# Altium PCB standos_rpi_com — копия.PcbDoc (part 2 of 2)
Units mm, origin at the board's own origin, x right, y up, seen from the top; angles counter-clockwise.
Board outline 197 x 179 mm, 2 copper layers (Top Layer, Bottom Layer); 29 components, 567 nets, 1552 pads, 0 vias.
Unrouted connection lines stored in the file: 121.
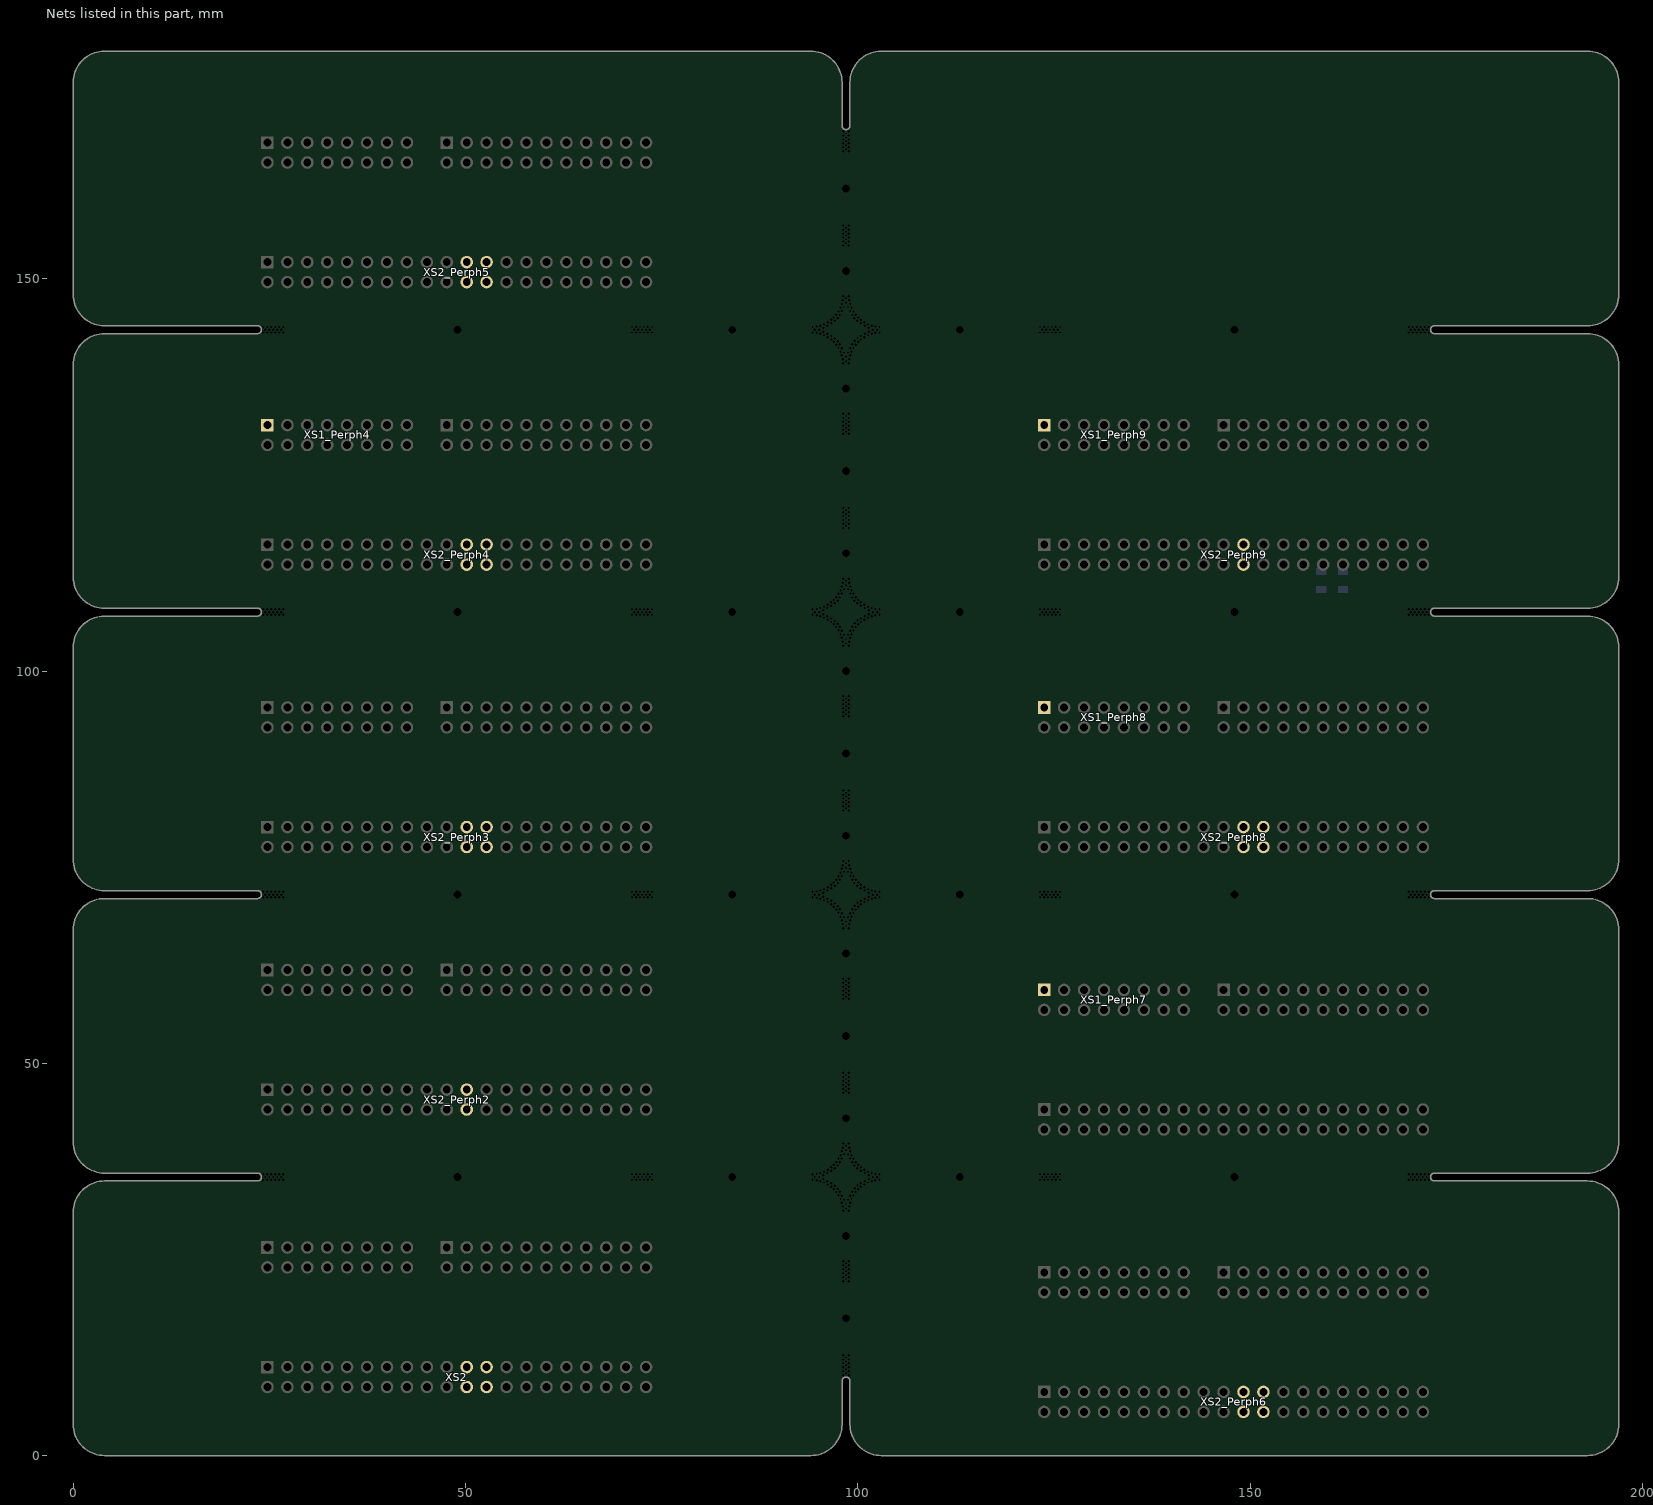
[diagram p2: the nets of this part, all layers, seen from the top]

## Nets (pads, with @x,y where several pads share a name; then routed paths per layer and width w, separated by ;. In a path a pad name is that pad's centre, name@x,y a point inside that pad or via, vN(x,y) a via of type N, cw(c..) or ccw(c..) an arc to the next point about the centre after c; other vN are vias at no path point) (continued)
STEPMOTOR.IN4_Perph4: XS1_Perph4.1
STEPMOTOR.IN4_Perph7: XS1_Perph7.1
STEPMOTOR.IN4_Perph8: XS1_Perph8.1
STEPMOTOR.IN4_Perph9: XS1_Perph9.1
ULTRASONIC_HC0.ECHO_Perph1: XS2.24
ULTRASONIC_HC0.ECHO_Perph3: XS2_Perph3.24
ULTRASONIC_HC0.ECHO_Perph4: XS2_Perph4.24
ULTRASONIC_HC0.ECHO_Perph5: XS2_Perph5.24
ULTRASONIC_HC0.ECHO_Perph6: XS2_Perph6.24
ULTRASONIC_HC0.ECHO_Perph8: XS2_Perph8.24
ULTRASONIC_HC0.TRIG_Perph1: XS2.23
ULTRASONIC_HC0.TRIG_Perph3: XS2_Perph3.23
ULTRASONIC_HC0.TRIG_Perph4: XS2_Perph4.23
ULTRASONIC_HC0.TRIG_Perph5: XS2_Perph5.23
ULTRASONIC_HC0.TRIG_Perph6: XS2_Perph6.23
ULTRASONIC_HC0.TRIG_Perph8: XS2_Perph8.23
ULTRASONIC_HC1.ECHO_Perph1: XS2.21
ULTRASONIC_HC1.ECHO_Perph2: XS2_Perph2.21
ULTRASONIC_HC1.ECHO_Perph3: XS2_Perph3.21
ULTRASONIC_HC1.ECHO_Perph4: XS2_Perph4.21
ULTRASONIC_HC1.ECHO_Perph5: XS2_Perph5.21
ULTRASONIC_HC1.ECHO_Perph6: XS2_Perph6.21
ULTRASONIC_HC1.ECHO_Perph8: XS2_Perph8.21
ULTRASONIC_HC1.ECHO_Perph9: XS2_Perph9.21
ULTRASONIC_HC1.TRIG_Perph1: XS2.22
ULTRASONIC_HC1.TRIG_Perph2: XS2_Perph2.22
ULTRASONIC_HC1.TRIG_Perph3: XS2_Perph3.22
ULTRASONIC_HC1.TRIG_Perph4: XS2_Perph4.22
ULTRASONIC_HC1.TRIG_Perph5: XS2_Perph5.22
ULTRASONIC_HC1.TRIG_Perph6: XS2_Perph6.22
ULTRASONIC_HC1.TRIG_Perph8: XS2_Perph8.22
ULTRASONIC_HC1.TRIG_Perph9: XS2_Perph9.22
pads on no net: XS2.1 XS2.2 XS2_Perph2.1 XS2_Perph2.2 XS2_Perph3.1 XS2_Perph3.2 XS2_Perph4.1 XS2_Perph4.2 XS2_Perph5.1 XS2_Perph5.2 XS2_Perph6.1 XS2_Perph6.2 XS2_Perph7.1 XS2_Perph7.2 XS2_Perph8.1 XS2_Perph8.2 XS2_Perph9.1 XS2_Perph9.2

## Silkscreen, mask and mechanical layers (free items; w line width, h text height)
Top Overlay:
  drawing of 1683 lines, arcs and shapes, not listed
  text "STEPMTR" at 23.914,177.383 h0.64
  text "GYRO" at 29.946,177.383 h0.64
  text "NAV" at 35.344,177.383 h0.64
  text "PWR" at 49.314,177.383 h0.64
  text "SPI1" at 54.235,177.383 h0.64
  text "SPI4" at 60.479,177.383 h0.64
  text "UART5" at 66.459,177.383 h0.64
  text "GPIO" at 70.639,177.383 h0.64
  text "STEPMOTOR" at 5.26,177.1 h0.64
  text "ADS1115" at 15.76,177.1 h0.64
  text "StandOS" at 76.5,176.75 h1
  text "v.2 2022" at 89.15,176.65 h0.9
  text "MOSI" at 34.074,175.605 h0.51
  text "MISO" at 61.971,175.605 h0.51
  text "MOSI" at 56.849,175.554 h0.56
  text "SCLK" at 36.389,175.529 h0.58
  text "IN4" at 23.967,175.478 h0.64
  text "IN2" at 26.507,175.478 h0.64
  text "INT" at 29.047,175.478 h0.64
  text "CS" at 31.851,175.478 h0.64
  text "INT" at 39.207,175.478 h0.64
  text "5V" at 49.631,175.478 h0.64
  text "GND" at 64.554,175.478 h0.64
  text "TX" at 67.411,175.478 h0.64
  text "nCE / 1" at 51.727,174.285 h0.64
  text "nCE / 0" at 54.267,174.285 h0.64
  text "nCE / 0" at 59.347,174.285 h0.64
  text "27" at 69.242,174.285 h0.58
  text "11" at 71.782,174.285 h0.51
  text "CS / M" at 41.62,174.168 h0.64
  text "Commutation board / for Raspberry Pi" at 76.25,173.225 h0.8
  text "MISO" at 56.891,173.065 h0.51
  text "MOSI" at 64.554,173.065 h0.51
  text "MISO" at 36.438,172.989 h0.58
  text "IN3" at 23.967,172.938 h0.64
  text "IN1" at 26.612,172.938 h0.64
  text "DR" at 29.311,172.938 h0.64
  text "SDO" at 31.534,172.938 h0.64
  text "3V3" at 49.314,172.938 h0.64
  text "SCK" at 54.394,172.938 h0.64
  text "SCK" at 62.014,172.938 h0.64
  text "RX" at 67.411,172.938 h0.64
  text "CS / A/G" at 33.64,171.745 h0.58
  text "nCE / 2" at 51.727,171.745 h0.64
  text "nCE / 1" at 59.347,171.745 h0.64
  text "26" at 69.242,171.745 h0.58
  text "8" at 71.782,171.745 h0.58
  text "DRDY / M" at 38.392,171.628 h0.58
  text "CS / ALT" at 41.567,171.628 h0.64
  text "GYRO GY-50" at 1.51,169.6 h0.64
  text "KEYPAD COM-08653" at 9.76,169.6 h0.64
  text "#" at 76.26,169.4 h2.4
  text "AUDIO" at 90.118,166.711 h0.64
  text "DISPLAY MSP3520" at 78.01,166.6 h0.64
  text "PMOD NAV" at 1.76,163.1 h0.64
  text "H0 & H1" at 90.368,160.6 h0.64
  text "Variant 5" at 27.933,158.852 h5
  text "RFID RC522" at 76.885,156.711 h0.64
  text "PMOD COLOR" at 1.51,156.645 h0.64
  text "LEDS" at 8.618,156.6 h0.64
  text "BUTTONS" at 15.618,156.6 h0.64
  text "H1" at 90.118,156.6 h0.64
  text "H0" at 89.834,150.211 h0.64
  text "PMODENC" at 1.76,150.1 h0.64
  text "KY-038" at 8.618,150.1 h0.64
  text "GL5516" at 15.76,150.1 h0.64
  text "GP2Y0A02YK0F" at 77.57,150.1 h0.64
  text "ALRT" at 23.829,149.57 h0.51
  text "MDS" at 26.454,149.443 h0.64
  text "B" at 29.628,149.443 h0.64
  text "SWT" at 31.534,149.443 h0.64
  text "C1" at 34.497,149.443 h0.64
  text "C0" at 36.931,149.443 h0.64
  text "C2" at 39.471,149.443 h0.64
  text "R1" at 42.117,149.443 h0.64
  text "RX" at 44.551,149.443 h0.64
  text "PWM" at 46.774,149.443 h0.64
  text "H1E" at 49.367,149.443 h0.64
  text "H0T" at 51.854,149.443 h0.64
  text "IRQ" at 54.447,149.443 h0.64
  text "MOSI" at 56.722,149.443 h0.64
  text "SS" at 59.791,149.443 h0.64
  text "GND" at 72.174,149.443 h0.64
  text "LCD / nCE" at 61.569,148.25 h0.51
  text "LCD / DC/RS" at 63.792,148.25 h0.51
  text "TCH / nCE" at 66.967,148.25 h0.51
  text "MISO" at 69.242,148.25 h0.64
  text "MOSI" at 69.634,147.03 h0.51
  text "INT" at 23.967,146.903 h0.64
  text "RST" at 26.454,146.903 h0.64
  text "A" at 29.628,146.903 h0.64
  text "BTN" at 31.534,146.903 h0.64
  text "GND" at 34.074,146.903 h0.64
  text "R0" at 36.931,146.903 h0.64
  text "R3" at 39.471,146.903 h0.64
  text "R2" at 42.011,146.903 h0.64
  text "AN" at 44.551,146.903 h0.64
  text "TX" at 47.091,146.903 h0.64
  text "H1T" at 49.367,146.903 h0.64
  text "H0E" at 51.854,146.903 h0.64
  text "RST" at 54.394,146.903 h0.64
  text "MISO" at 56.669,146.903 h0.64
  text "SCK" at 59.474,146.903 h0.64
  text "CRD / nCE" at 61.569,145.71 h0.51
  text "LCD / RST" at 64.427,145.71 h0.51
  text "SCK" at 66.967,145.71 h0.51
  text "TCH / IRQ" at 72.047,145.71 h0.51
  text "ADC" at 23.787,144.617 h0.64
  text "ENCODER" at 28.867,144.617 h0.64
  text "KEYPAD" at 36.487,144.617 h0.64
  text "SONAR" at 44.107,144.617 h0.64
  text "SONIC" at 49.187,144.617 h0.64
  text "RFID" at 55.537,144.617 h0.64
  text "DISPLAY" at 65.697,144.617 h0.64
  text "STEPMTR" at 23.914,141.383 h0.64
  text "GYRO" at 29.946,141.383 h0.64
  text "NAV" at 35.344,141.383 h0.64
  text "PWR" at 49.314,141.383 h0.64
  text "SPI1" at 54.235,141.383 h0.64
  text "SPI4" at 60.479,141.383 h0.64
  text "UART5" at 66.459,141.383 h0.64
  text "GPIO" at 70.639,141.383 h0.64
  text "STEPMTR" at 122.914,141.383 h0.64
  text "GYRO" at 128.946,141.383 h0.64
  text "NAV" at 134.344,141.383 h0.64
  text "PWR" at 148.314,141.383 h0.64
  text "SPI1" at 153.235,141.383 h0.64
  text "SPI4" at 159.479,141.383 h0.64
  text "UART5" at 165.459,141.383 h0.64
  text "GPIO" at 169.639,141.383 h0.64
  text "STEPMOTOR" at 5.26,141.1 h0.64
  text "ADS1115" at 15.76,141.1 h0.64
  text "STEPMOTOR" at 104.26,141.1 h0.64
  text "ADS1115" at 114.76,141.1 h0.64
  text "StandOS" at 76.5,140.75 h1
  text "StandOS" at 175.5,140.75 h1
  text "v.2 2022" at 89.15,140.65 h0.9
  text "v.2 2022" at 188.15,140.65 h0.9
  text "MOSI" at 34.074,139.605 h0.51
  text "MISO" at 61.971,139.605 h0.51
  text "MOSI" at 133.074,139.605 h0.51
  text "MISO" at 160.971,139.605 h0.51
  text "MOSI" at 56.849,139.554 h0.56
  text "MOSI" at 155.849,139.554 h0.56
  text "SCLK" at 36.389,139.529 h0.58
  text "SCLK" at 135.389,139.529 h0.58
  text "IN4" at 23.967,139.478 h0.64
  text "IN2" at 26.507,139.478 h0.64
  text "INT" at 29.047,139.478 h0.64
  text "CS" at 31.851,139.478 h0.64
  text "INT" at 39.207,139.478 h0.64
  text "5V" at 49.631,139.478 h0.64
  text "GND" at 64.554,139.478 h0.64
  text "TX" at 67.411,139.478 h0.64
  text "IN4" at 122.967,139.478 h0.64
  text "IN2" at 125.507,139.478 h0.64
  text "INT" at 128.047,139.478 h0.64
  text "CS" at 130.851,139.478 h0.64
  text "INT" at 138.207,139.478 h0.64
  text "5V" at 148.631,139.478 h0.64
  text "GND" at 163.554,139.478 h0.64
  text "TX" at 166.411,139.478 h0.64
  text "nCE / 1" at 51.727,138.285 h0.64
  text "nCE / 0" at 54.267,138.285 h0.64
  text "nCE / 0" at 59.347,138.285 h0.64
  text "27" at 69.242,138.285 h0.58
  text "11" at 71.782,138.285 h0.51
  text "nCE / 1" at 150.727,138.285 h0.64
  text "nCE / 0" at 153.267,138.285 h0.64
  text "nCE / 0" at 158.347,138.285 h0.64
  text "27" at 168.242,138.285 h0.58
  text "11" at 170.782,138.285 h0.51
  text "CS / M" at 41.62,138.168 h0.64
  text "CS / M" at 140.62,138.168 h0.64
  text "Commutation board / for Raspberry Pi" at 76.25,137.225 h0.8
  text "Commutation board / for Raspberry Pi" at 175.25,137.225 h0.8
  text "MISO" at 56.891,137.065 h0.51
  text "MOSI" at 64.554,137.065 h0.51
  text "MISO" at 155.891,137.065 h0.51
  text "MOSI" at 163.554,137.065 h0.51
  text "MISO" at 36.438,136.989 h0.58
  text "MISO" at 135.438,136.989 h0.58
  text "IN3" at 23.967,136.938 h0.64
  text "IN1" at 26.612,136.938 h0.64
  text "DR" at 29.311,136.938 h0.64
  text "SDO" at 31.534,136.938 h0.64
  text "3V3" at 49.314,136.938 h0.64
  text "SCK" at 54.394,136.938 h0.64
  text "SCK" at 62.014,136.938 h0.64
  text "RX" at 67.411,136.938 h0.64
  text "IN3" at 122.967,136.938 h0.64
  text "IN1" at 125.612,136.938 h0.64
  text "DR" at 128.311,136.938 h0.64
  text "SDO" at 130.534,136.938 h0.64
  text "3V3" at 148.314,136.938 h0.64
  text "SCK" at 153.394,136.938 h0.64
  text "SCK" at 161.014,136.938 h0.64
  text "RX" at 166.411,136.938 h0.64
  text "CS / A/G" at 33.64,135.745 h0.58
  text "nCE / 2" at 51.727,135.745 h0.64
  text "nCE / 1" at 59.347,135.745 h0.64
  text "26" at 69.242,135.745 h0.58
  text "8" at 71.782,135.745 h0.58
  text "CS / A/G" at 132.64,135.745 h0.58
  text "nCE / 2" at 150.727,135.745 h0.64
  text "nCE / 1" at 158.347,135.745 h0.64
  text "26" at 168.242,135.745 h0.58
  text "8" at 170.782,135.745 h0.58
  text "DRDY / M" at 38.392,135.628 h0.58
  text "CS / ALT" at 41.567,135.628 h0.64
  text "DRDY / M" at 137.392,135.628 h0.58
  text "CS / ALT" at 140.567,135.628 h0.64
  text "GYRO GY-50" at 1.51,133.6 h0.64
  text "KEYPAD COM-08653" at 9.76,133.6 h0.64
  text "GYRO GY-50" at 100.51,133.6 h0.64
  text "KEYPAD COM-08653" at 108.76,133.6 h0.64
  text "#" at 76.26,133.4 h2.4
  text "#" at 175.26,133.4 h2.4
  text "AUDIO" at 90.118,130.711 h0.64
  text "AUDIO" at 189.118,130.711 h0.64
  text "DISPLAY MSP3520" at 78.01,130.6 h0.64
  text "DISPLAY MSP3520" at 177.01,130.6 h0.64
  text "PMOD NAV" at 1.76,127.1 h0.64
  text "PMOD NAV" at 100.76,127.1 h0.64
  text "H0 & H1" at 90.368,124.6 h0.64
  text "H0 & H1" at 189.368,124.6 h0.64
  text "IND" at 192.25,123 h0.6
  text "Variant 4" at 27.933,122.852 h5
  text "Variant 9" at 126.933,122.852 h5
  text "RFID RC522" at 76.885,120.711 h0.64
  text "RFID RC522" at 175.885,120.711 h0.64
  text "PMOD COLOR" at 1.51,120.645 h0.64
  text "PMOD COLOR" at 100.51,120.645 h0.64
  text "LEDS" at 8.618,120.6 h0.64
  text "BUTTONS" at 15.618,120.6 h0.64
  text "H1" at 90.118,120.6 h0.64
  text "LEDS" at 107.618,120.6 h0.64
  text "BUTTONS" at 114.618,120.6 h0.64
  text "H1" at 189.118,120.6 h0.64
  text "H0" at 89.834,114.211 h0.64
  text "H0" at 188.834,114.211 h0.64
  text "PMODENC" at 1.76,114.1 h0.64
  text "KY-038" at 8.618,114.1 h0.64
  text "GL5516" at 15.76,114.1 h0.64
  text "GP2Y0A02YK0F" at 77.57,114.1 h0.64
  text "PMODENC" at 100.76,114.1 h0.64
  text "KY-038" at 107.618,114.1 h0.64
  text "GL5516" at 114.76,114.1 h0.64
  text "GP2Y0A02YK0F" at 176.57,114.1 h0.64
  text "ALRT" at 23.829,113.57 h0.51
  text "ALRT" at 122.829,113.57 h0.51
  text "MDS" at 26.454,113.443 h0.64
  text "B" at 29.628,113.443 h0.64
  text "SWT" at 31.534,113.443 h0.64
  text "C1" at 34.497,113.443 h0.64
  text "C0" at 36.931,113.443 h0.64
  text "C2" at 39.471,113.443 h0.64
  text "R1" at 42.117,113.443 h0.64
  text "RX" at 44.551,113.443 h0.64
  text "PWM" at 46.774,113.443 h0.64
  text "H1E" at 49.367,113.443 h0.64
  text "H0T" at 51.854,113.443 h0.64
  text "IRQ" at 54.447,113.443 h0.64
  text "MOSI" at 56.722,113.443 h0.64
  text "SS" at 59.791,113.443 h0.64
  text "GND" at 72.174,113.443 h0.64
  text "MDS" at 125.454,113.443 h0.64
  text "B" at 128.628,113.443 h0.64
  text "SWT" at 130.534,113.443 h0.64
  text "C1" at 133.497,113.443 h0.64
  text "C0" at 135.931,113.443 h0.64
  text "C2" at 138.471,113.443 h0.64
  text "R1" at 141.117,113.443 h0.64
  text "RX" at 143.551,113.443 h0.64
  text "PWM" at 145.774,113.443 h0.64
  text "H1E" at 148.367,113.443 h0.64
  text "H0T" at 150.854,113.443 h0.64
  text "IRQ" at 153.447,113.443 h0.64
  text "MOSI" at 155.722,113.443 h0.64
  text "SS" at 158.791,113.443 h0.64
  text "GND" at 171.174,113.443 h0.64
  text "LCD / nCE" at 61.569,112.25 h0.51
  text "LCD / DC/RS" at 63.792,112.25 h0.51
  text "TCH / nCE" at 66.967,112.25 h0.51
  text "MISO" at 69.242,112.25 h0.64
  text "LCD / nCE" at 160.569,112.25 h0.51
  text "LCD / DC/RS" at 162.792,112.25 h0.51
  text "TCH / nCE" at 165.967,112.25 h0.51
  text "MISO" at 168.242,112.25 h0.64
  text "MOSI" at 69.634,111.03 h0.51
  text "MOSI" at 168.634,111.03 h0.51
  text "INT" at 23.967,110.903 h0.64
  text "RST" at 26.454,110.903 h0.64
  text "A" at 29.628,110.903 h0.64
  text "BTN" at 31.534,110.903 h0.64
  text "GND" at 34.074,110.903 h0.64
  text "R0" at 36.931,110.903 h0.64
  text "R3" at 39.471,110.903 h0.64
  text "R2" at 42.011,110.903 h0.64
  text "AN" at 44.551,110.903 h0.64
  text "TX" at 47.091,110.903 h0.64
  text "H1T" at 49.367,110.903 h0.64
  text "H0E" at 51.854,110.903 h0.64
  text "RST" at 54.394,110.903 h0.64
  text "MISO" at 56.669,110.903 h0.64
  text "SCK" at 59.474,110.903 h0.64
  text "INT" at 122.967,110.903 h0.64
  text "RST" at 125.454,110.903 h0.64
  text "A" at 128.628,110.903 h0.64
  text "BTN" at 130.534,110.903 h0.64
  text "GND" at 133.074,110.903 h0.64
  text "R0" at 135.931,110.903 h0.64
  text "R3" at 138.471,110.903 h0.64
  text "R2" at 141.011,110.903 h0.64
  text "AN" at 143.551,110.903 h0.64
  text "TX" at 146.091,110.903 h0.64
  text "H1T" at 148.367,110.903 h0.64
  text "H0E" at 150.854,110.903 h0.64
  text "RST" at 153.394,110.903 h0.64
  text "MISO" at 155.669,110.903 h0.64
  text "SCK" at 158.474,110.903 h0.64
  text "CRD / nCE" at 61.569,109.71 h0.51
  text "LCD / RST" at 64.427,109.71 h0.51
  text "SCK" at 66.967,109.71 h0.51
  text "TCH / IRQ" at 72.047,109.71 h0.51
  text "CRD / nCE" at 160.569,109.71 h0.51
  text "LCD / RST" at 163.427,109.71 h0.51
  text "SCK" at 165.967,109.71 h0.51
  text "TCH / IRQ" at 171.047,109.71 h0.51
  text "ADC" at 23.787,108.617 h0.64
  text "ENCODER" at 28.867,108.617 h0.64
  text "KEYPAD" at 36.487,108.617 h0.64
  text "SONAR" at 44.107,108.617 h0.64
  text "SONIC" at 49.187,108.617 h0.64
  text "RFID" at 55.537,108.617 h0.64
  text "DISPLAY" at 65.697,108.617 h0.64
  text "ADC" at 122.787,108.617 h0.64
  text "ENCODER" at 127.867,108.617 h0.64
  text "KEYPAD" at 135.487,108.617 h0.64
  text "SONAR" at 143.107,108.617 h0.64
  text "SONIC" at 148.187,108.617 h0.64
  text "RFID" at 154.537,108.617 h0.64
  text "DISPLAY" at 164.697,108.617 h0.64
  text "STEPMTR" at 23.914,105.383 h0.64
  text "GYRO" at 29.946,105.383 h0.64
  text "NAV" at 35.344,105.383 h0.64
  text "PWR" at 49.314,105.383 h0.64
  text "SPI1" at 54.235,105.383 h0.64
  text "SPI4" at 60.479,105.383 h0.64
  text "UART5" at 66.459,105.383 h0.64
  text "GPIO" at 70.639,105.383 h0.64
  text "STEPMTR" at 122.914,105.383 h0.64
  text "GYRO" at 128.946,105.383 h0.64
  text "NAV" at 134.344,105.383 h0.64
  text "PWR" at 148.314,105.383 h0.64
  text "SPI1" at 153.235,105.383 h0.64
  text "SPI4" at 159.479,105.383 h0.64
  text "UART5" at 165.459,105.383 h0.64
  text "GPIO" at 169.639,105.383 h0.64
  text "STEPMOTOR" at 5.26,105.1 h0.64
  text "ADS1115" at 15.76,105.1 h0.64
  text "STEPMOTOR" at 104.26,105.1 h0.64
  text "ADS1115" at 114.76,105.1 h0.64
  text "StandOS" at 76.5,104.75 h1
  text "StandOS" at 175.5,104.75 h1
  text "v.2 2022" at 89.15,104.65 h0.9
  text "v.2 2022" at 188.15,104.65 h0.9
  text "MOSI" at 34.074,103.605 h0.51
  text "MISO" at 61.971,103.605 h0.51
  text "MOSI" at 133.074,103.605 h0.51
  text "MISO" at 160.971,103.605 h0.51
  text "MOSI" at 56.849,103.554 h0.56
  text "MOSI" at 155.849,103.554 h0.56
  text "SCLK" at 36.389,103.529 h0.58
  text "SCLK" at 135.389,103.529 h0.58
  text "IN4" at 23.967,103.478 h0.64
  text "IN2" at 26.507,103.478 h0.64
  text "INT" at 29.047,103.478 h0.64
  text "CS" at 31.851,103.478 h0.64
  text "INT" at 39.207,103.478 h0.64
  text "5V" at 49.631,103.478 h0.64
  text "GND" at 64.554,103.478 h0.64
  text "TX" at 67.411,103.478 h0.64
  text "IN4" at 122.967,103.478 h0.64
  text "IN2" at 125.507,103.478 h0.64
  text "INT" at 128.047,103.478 h0.64
  text "CS" at 130.851,103.478 h0.64
  text "INT" at 138.207,103.478 h0.64
  text "5V" at 148.631,103.478 h0.64
  text "GND" at 163.554,103.478 h0.64
  text "TX" at 166.411,103.478 h0.64
  text "nCE / 1" at 51.727,102.285 h0.64
  text "nCE / 0" at 54.267,102.285 h0.64
  text "nCE / 0" at 59.347,102.285 h0.64
  text "27" at 69.242,102.285 h0.58
  text "11" at 71.782,102.285 h0.51
  text "nCE / 1" at 150.727,102.285 h0.64
  text "nCE / 0" at 153.267,102.285 h0.64
  text "nCE / 0" at 158.347,102.285 h0.64
  text "27" at 168.242,102.285 h0.58
  text "11" at 170.782,102.285 h0.51
  text "CS / M" at 41.62,102.168 h0.64
  text "CS / M" at 140.62,102.168 h0.64
  text "Commutation board / for Raspberry Pi" at 76.25,101.225 h0.8
  text "Commutation board / for Raspberry Pi" at 175.25,101.225 h0.8
  text "MISO" at 56.891,101.065 h0.51
  text "MOSI" at 64.554,101.065 h0.51
  text "MISO" at 155.891,101.065 h0.51
  text "MOSI" at 163.554,101.065 h0.51
  text "MISO" at 36.438,100.989 h0.58
  text "MISO" at 135.438,100.989 h0.58
  text "IN3" at 23.967,100.938 h0.64
  text "IN1" at 26.612,100.938 h0.64
  text "DR" at 29.311,100.938 h0.64
  text "SDO" at 31.534,100.938 h0.64
  text "3V3" at 49.314,100.938 h0.64
  text "SCK" at 54.394,100.938 h0.64
  text "SCK" at 62.014,100.938 h0.64
  text "RX" at 67.411,100.938 h0.64
  text "IN3" at 122.967,100.938 h0.64
  text "IN1" at 125.612,100.938 h0.64
  text "DR" at 128.311,100.938 h0.64
  text "SDO" at 130.534,100.938 h0.64
  text "3V3" at 148.314,100.938 h0.64
  text "SCK" at 153.394,100.938 h0.64
  text "SCK" at 161.014,100.938 h0.64
  text "RX" at 166.411,100.938 h0.64
  text "CS / A/G" at 33.64,99.745 h0.58
  text "nCE / 2" at 51.727,99.745 h0.64
  text "nCE / 1" at 59.347,99.745 h0.64
  text "26" at 69.242,99.745 h0.58
  text "8" at 71.782,99.745 h0.58
  text "CS / A/G" at 132.64,99.745 h0.58
  text "nCE / 2" at 150.727,99.745 h0.64
  text "nCE / 1" at 158.347,99.745 h0.64
  text "26" at 168.242,99.745 h0.58
  text "8" at 170.782,99.745 h0.58
  text "DRDY / M" at 38.392,99.628 h0.58
  text "CS / ALT" at 41.567,99.628 h0.64
  text "DRDY / M" at 137.392,99.628 h0.58
  text "CS / ALT" at 140.567,99.628 h0.64
  text "GYRO GY-50" at 1.51,97.6 h0.64
  text "KEYPAD COM-08653" at 9.76,97.6 h0.64
  text "GYRO GY-50" at 100.51,97.6 h0.64
  text "KEYPAD COM-08653" at 108.76,97.6 h0.64
  text "#" at 76.26,97.4 h2.4
  text "#" at 175.26,97.4 h2.4
  text "AUDIO" at 90.118,94.711 h0.64
  text "AUDIO" at 189.118,94.711 h0.64
  text "DISPLAY MSP3520" at 78.01,94.6 h0.64
  text "DISPLAY MSP3520" at 177.01,94.6 h0.64
  text "PMOD NAV" at 1.76,91.1 h0.64
  text "PMOD NAV" at 100.76,91.1 h0.64
  text "H0 & H1" at 90.368,88.6 h0.64
  text "H0 & H1" at 189.368,88.6 h0.64
  text "Variant 3" at 27.933,86.852 h5
  text "Variant 8" at 126.933,86.852 h5
  text "RFID RC522" at 76.885,84.711 h0.64
  text "RFID RC522" at 175.885,84.711 h0.64
  text "PMOD COLOR" at 1.51,84.645 h0.64
  text "PMOD COLOR" at 100.51,84.645 h0.64
  text "LEDS" at 8.618,84.6 h0.64
  text "BUTTONS" at 15.618,84.6 h0.64
  text "H1" at 90.118,84.6 h0.64
  text "LEDS" at 107.618,84.6 h0.64
  text "BUTTONS" at 114.618,84.6 h0.64
  text "H1" at 189.118,84.6 h0.64
  text "H0" at 89.834,78.211 h0.64
  text "H0" at 188.834,78.211 h0.64
  text "PMODENC" at 1.76,78.1 h0.64
  text "KY-038" at 8.618,78.1 h0.64
  text "GL5516" at 15.76,78.1 h0.64
  text "GP2Y0A02YK0F" at 77.57,78.1 h0.64
  text "PMODENC" at 100.76,78.1 h0.64
  text "KY-038" at 107.618,78.1 h0.64
  text "GL5516" at 114.76,78.1 h0.64
  text "GP2Y0A02YK0F" at 176.57,78.1 h0.64
  text "ALRT" at 23.829,77.57 h0.51
  text "ALRT" at 122.829,77.57 h0.51
  text "MDS" at 26.454,77.443 h0.64
  text "B" at 29.628,77.443 h0.64
  text "SWT" at 31.534,77.443 h0.64
  text "C1" at 34.497,77.443 h0.64
  text "C0" at 36.931,77.443 h0.64
  text "C2" at 39.471,77.443 h0.64
  text "R1" at 42.117,77.443 h0.64
  text "RX" at 44.551,77.443 h0.64
  text "PWM" at 46.774,77.443 h0.64
  text "H1E" at 49.367,77.443 h0.64
  text "H0T" at 51.854,77.443 h0.64
  text "IRQ" at 54.447,77.443 h0.64
  text "MOSI" at 56.722,77.443 h0.64
  text "SS" at 59.791,77.443 h0.64
  text "GND" at 72.174,77.443 h0.64
  text "MDS" at 125.454,77.443 h0.64
  text "B" at 128.628,77.443 h0.64
  text "SWT" at 130.534,77.443 h0.64
  text "C1" at 133.497,77.443 h0.64
  text "C0" at 135.931,77.443 h0.64
  text "C2" at 138.471,77.443 h0.64
  text "R1" at 141.117,77.443 h0.64
  text "RX" at 143.551,77.443 h0.64
  text "PWM" at 145.774,77.443 h0.64
  text "H1E" at 148.367,77.443 h0.64
  text "H0T" at 150.854,77.443 h0.64
  text "IRQ" at 153.447,77.443 h0.64
  text "MOSI" at 155.722,77.443 h0.64
  text "SS" at 158.791,77.443 h0.64
  text "GND" at 171.174,77.443 h0.64
  text "LCD / nCE" at 61.569,76.25 h0.51
  text "LCD / DC/RS" at 63.792,76.25 h0.51
  text "TCH / nCE" at 66.967,76.25 h0.51
  text "MISO" at 69.242,76.25 h0.64
  text "LCD / nCE" at 160.569,76.25 h0.51
  text "LCD / DC/RS" at 162.792,76.25 h0.51
  text "TCH / nCE" at 165.967,76.25 h0.51
  text "MISO" at 168.242,76.25 h0.64
  text "MOSI" at 69.634,75.03 h0.51
  text "MOSI" at 168.634,75.03 h0.51
  text "INT" at 23.967,74.903 h0.64
  text "RST" at 26.454,74.903 h0.64
  text "A" at 29.628,74.903 h0.64
  text "BTN" at 31.534,74.903 h0.64
  text "GND" at 34.074,74.903 h0.64
  text "R0" at 36.931,74.903 h0.64
  text "R3" at 39.471,74.903 h0.64
  text "R2" at 42.011,74.903 h0.64
  text "AN" at 44.551,74.903 h0.64
  text "TX" at 47.091,74.903 h0.64
  text "H1T" at 49.367,74.903 h0.64
  text "H0E" at 51.854,74.903 h0.64
  text "RST" at 54.394,74.903 h0.64
  text "MISO" at 56.669,74.903 h0.64
  text "SCK" at 59.474,74.903 h0.64
  text "INT" at 122.967,74.903 h0.64
  text "RST" at 125.454,74.903 h0.64
  text "A" at 128.628,74.903 h0.64
  text "BTN" at 130.534,74.903 h0.64
  text "GND" at 133.074,74.903 h0.64
  text "R0" at 135.931,74.903 h0.64
  text "R3" at 138.471,74.903 h0.64
  text "R2" at 141.011,74.903 h0.64
  text "AN" at 143.551,74.903 h0.64
  text "TX" at 146.091,74.903 h0.64
  text "H1T" at 148.367,74.903 h0.64
  text "H0E" at 150.854,74.903 h0.64
  text "RST" at 153.394,74.903 h0.64
  text "MISO" at 155.669,74.903 h0.64
  text "SCK" at 158.474,74.903 h0.64
  text "CRD / nCE" at 61.569,73.71 h0.51
  text "LCD / RST" at 64.427,73.71 h0.51
  text "SCK" at 66.967,73.71 h0.51
  text "TCH / IRQ" at 72.047,73.71 h0.51
  text "CRD / nCE" at 160.569,73.71 h0.51
  text "LCD / RST" at 163.427,73.71 h0.51
  text "SCK" at 165.967,73.71 h0.51
  text "TCH / IRQ" at 171.047,73.71 h0.51
  text "ADC" at 23.787,72.617 h0.64
  text "ENCODER" at 28.867,72.617 h0.64
  text "KEYPAD" at 36.487,72.617 h0.64
  text "SONAR" at 44.107,72.617 h0.64
  text "SONIC" at 49.187,72.617 h0.64
  text "RFID" at 55.537,72.617 h0.64
  text "DISPLAY" at 65.697,72.617 h0.64
  text "ADC" at 122.787,72.617 h0.64
  text "ENCODER" at 127.867,72.617 h0.64
  text "KEYPAD" at 135.487,72.617 h0.64
  text "SONAR" at 143.107,72.617 h0.64
  text "SONIC" at 148.187,72.617 h0.64
  text "RFID" at 154.537,72.617 h0.64
  text "DISPLAY" at 164.697,72.617 h0.64
  text "STEPMTR" at 23.914,69.383 h0.64
  text "GYRO" at 29.946,69.383 h0.64
  text "NAV" at 35.344,69.383 h0.64
  text "PWR" at 49.314,69.383 h0.64
  text "SPI1" at 54.235,69.383 h0.64
  text "SPI4" at 60.479,69.383 h0.64
  text "UART5" at 66.459,69.383 h0.64
  text "GPIO" at 70.639,69.383 h0.64
  text "STEPMTR" at 122.914,69.383 h0.64
  text "GYRO" at 128.946,69.383 h0.64
  text "NAV" at 134.344,69.383 h0.64
  text "PWR" at 148.314,69.383 h0.64
  text "SPI1" at 153.235,69.383 h0.64
  text "SPI4" at 159.479,69.383 h0.64
  text "UART5" at 165.459,69.383 h0.64
  text "GPIO" at 169.639,69.383 h0.64
  text "STEPMOTOR" at 5.26,69.1 h0.64
  text "ADS1115" at 15.76,69.1 h0.64
  text "STEPMOTOR" at 104.26,69.1 h0.64
  text "ADS1115" at 114.76,69.1 h0.64
  text "StandOS" at 76.5,68.75 h1
  text "StandOS" at 175.5,68.75 h1
  text "v.2 2022" at 89.15,68.65 h0.9
  text "v.2 2022" at 188.15,68.65 h0.9
  text "MOSI" at 34.074,67.605 h0.51
  text "MISO" at 61.971,67.605 h0.51
  text "MOSI" at 133.074,67.605 h0.51
  text "MISO" at 160.971,67.605 h0.51
  text "MOSI" at 56.849,67.554 h0.56
  text "MOSI" at 155.849,67.554 h0.56
  text "SCLK" at 36.389,67.529 h0.58
  text "SCLK" at 135.389,67.529 h0.58
  text "IN4" at 23.967,67.478 h0.64
  text "IN2" at 26.507,67.478 h0.64
  text "INT" at 29.047,67.478 h0.64
  text "CS" at 31.851,67.478 h0.64
  text "INT" at 39.207,67.478 h0.64
  text "5V" at 49.631,67.478 h0.64
  text "GND" at 64.554,67.478 h0.64
  text "TX" at 67.411,67.478 h0.64
  text "IN4" at 122.967,67.478 h0.64
  text "IN2" at 125.507,67.478 h0.64
  text "INT" at 128.047,67.478 h0.64
  text "CS" at 130.851,67.478 h0.64
  text "INT" at 138.207,67.478 h0.64
  text "5V" at 148.631,67.478 h0.64
  text "GND" at 163.554,67.478 h0.64
  text "TX" at 166.411,67.478 h0.64
  text "nCE / 1" at 51.727,66.285 h0.64
  text "nCE / 0" at 54.267,66.285 h0.64
  text "nCE / 0" at 59.347,66.285 h0.64
  text "27" at 69.242,66.285 h0.58
  text "11" at 71.782,66.285 h0.51
  text "nCE / 1" at 150.727,66.285 h0.64
  text "nCE / 0" at 153.267,66.285 h0.64
  text "nCE / 0" at 158.347,66.285 h0.64
  text "27" at 168.242,66.285 h0.58
  text "11" at 170.782,66.285 h0.51
  text "CS / M" at 41.62,66.168 h0.64
  text "CS / M" at 140.62,66.168 h0.64
  text "Commutation board / for Raspberry Pi" at 76.25,65.225 h0.8
  text "Commutation board / for Raspberry Pi" at 175.25,65.225 h0.8
  text "MISO" at 56.891,65.065 h0.51
  text "MOSI" at 64.554,65.065 h0.51
  text "MISO" at 155.891,65.065 h0.51
  text "MOSI" at 163.554,65.065 h0.51
  text "MISO" at 36.438,64.989 h0.58
  text "MISO" at 135.438,64.989 h0.58
  text "IN3" at 23.967,64.938 h0.64
  text "IN1" at 26.612,64.938 h0.64
  text "DR" at 29.311,64.938 h0.64
  text "SDO" at 31.534,64.938 h0.64
  text "3V3" at 49.314,64.938 h0.64
  text "SCK" at 54.394,64.938 h0.64
  text "SCK" at 62.014,64.938 h0.64
  text "RX" at 67.411,64.938 h0.64
  text "IN3" at 122.967,64.938 h0.64
  text "IN1" at 125.612,64.938 h0.64
  text "DR" at 128.311,64.938 h0.64
  text "SDO" at 130.534,64.938 h0.64
  text "3V3" at 148.314,64.938 h0.64
  text "SCK" at 153.394,64.938 h0.64
  text "SCK" at 161.014,64.938 h0.64
  text "RX" at 166.411,64.938 h0.64
  text "CS / A/G" at 33.64,63.745 h0.58
  text "nCE / 2" at 51.727,63.745 h0.64
  text "nCE / 1" at 59.347,63.745 h0.64
  text "26" at 69.242,63.745 h0.58
  text "8" at 71.782,63.745 h0.58
  text "CS / A/G" at 132.64,63.745 h0.58
  text "nCE / 2" at 150.727,63.745 h0.64
  text "nCE / 1" at 158.347,63.745 h0.64
  text "26" at 168.242,63.745 h0.58
  text "8" at 170.782,63.745 h0.58
  text "DRDY / M" at 38.392,63.628 h0.58
  text "CS / ALT" at 41.567,63.628 h0.64
  text "DRDY / M" at 137.392,63.628 h0.58
  text "CS / ALT" at 140.567,63.628 h0.64
  text "GYRO GY-50" at 1.51,61.6 h0.64
  text "KEYPAD COM-08653" at 9.76,61.6 h0.64
  text "GYRO GY-50" at 100.51,61.6 h0.64
  text "KEYPAD COM-08653" at 108.76,61.6 h0.64
  text "#" at 76.26,61.4 h2.4
  text "#" at 175.26,61.4 h2.4
  text "AUDIO" at 90.118,58.711 h0.64
  text "AUDIO" at 189.118,58.711 h0.64
  text "DISPLAY MSP3520" at 78.01,58.6 h0.64
  text "DISPLAY MSP3520" at 177.01,58.6 h0.64
  text "PMOD NAV" at 1.76,55.1 h0.64
  text "PMOD NAV" at 100.76,55.1 h0.64
  text "H0 & H1" at 90.368,52.6 h0.64
  text "H0 & H1" at 189.368,52.6 h0.64
  text "IND" at 93.25,51 h0.6
  text "SYNC" at 189.475,51 h0.5
  text "Variant 2" at 27.933,50.852 h5
  text "Variant 7" at 126.933,50.852 h5
  text "RFID RC522" at 76.885,48.711 h0.64
  text "RFID RC522" at 175.885,48.711 h0.64
  text "PMOD COLOR" at 1.51,48.645 h0.64
  text "PMOD COLOR" at 100.51,48.645 h0.64
  text "LEDS" at 8.618,48.6 h0.64
  text "BUTTONS" at 15.618,48.6 h0.64
  text "H1" at 90.118,48.6 h0.64
  text "LEDS" at 107.618,48.6 h0.64
  text "BUTTONS" at 114.618,48.6 h0.64
  text "H1" at 189.118,48.6 h0.64
  text "H0" at 89.834,42.211 h0.64
  text "H0" at 188.834,42.211 h0.64
  text "PMODENC" at 1.76,42.1 h0.64
  text "KY-038" at 8.618,42.1 h0.64
  text "GL5516" at 15.76,42.1 h0.64
  text "GP2Y0A02YK0F" at 77.57,42.1 h0.64
  text "PMODENC" at 100.76,42.1 h0.64
  text "KY-038" at 107.618,42.1 h0.64
  text "GL5516" at 114.76,42.1 h0.64
  text "GP2Y0A02YK0F" at 176.57,42.1 h0.64
  text "ALRT" at 23.829,41.57 h0.51
  text "ALRT" at 122.829,41.57 h0.51
  text "MDS" at 26.454,41.443 h0.64
  text "B" at 29.628,41.443 h0.64
  text "SWT" at 31.534,41.443 h0.64
  text "C1" at 34.497,41.443 h0.64
  text "C0" at 36.931,41.443 h0.64
  text "C2" at 39.471,41.443 h0.64
  text "R1" at 42.117,41.443 h0.64
  text "RX" at 44.551,41.443 h0.64
  text "PWM" at 46.774,41.443 h0.64
  text "H1E" at 49.367,41.443 h0.64
  text "H0T" at 51.854,41.443 h0.64
  text "IRQ" at 54.447,41.443 h0.64
  text "MOSI" at 56.722,41.443 h0.64
  text "SS" at 59.791,41.443 h0.64
  text "GND" at 72.174,41.443 h0.64
  text "MDS" at 125.454,41.443 h0.64
  text "B" at 128.628,41.443 h0.64
  text "SWT" at 130.534,41.443 h0.64
  text "C1" at 133.497,41.443 h0.64
  text "C0" at 135.931,41.443 h0.64
  text "C2" at 138.471,41.443 h0.64
  text "R1" at 141.117,41.443 h0.64
  text "RX" at 143.551,41.443 h0.64
  text "PWM" at 145.774,41.443 h0.64
  text "H1E" at 148.367,41.443 h0.64
  text "H0T" at 150.854,41.443 h0.64
  text "IRQ" at 153.447,41.443 h0.64
  text "MOSI" at 155.722,41.443 h0.64
  text "SS" at 158.791,41.443 h0.64
  text "GND" at 171.174,41.443 h0.64
  text "LCD / nCE" at 61.569,40.25 h0.51
  text "LCD / DC/RS" at 63.792,40.25 h0.51
  text "TCH / nCE" at 66.967,40.25 h0.51
  text "MISO" at 69.242,40.25 h0.64
  text "LCD / nCE" at 160.569,40.25 h0.51
  text "LCD / DC/RS" at 162.792,40.25 h0.51
  text "TCH / nCE" at 165.967,40.25 h0.51
  text "MISO" at 168.242,40.25 h0.64
  text "MOSI" at 69.634,39.03 h0.51
  text "MOSI" at 168.634,39.03 h0.51
  text "INT" at 23.967,38.903 h0.64
  text "RST" at 26.454,38.903 h0.64
  text "A" at 29.628,38.903 h0.64
  text "BTN" at 31.534,38.903 h0.64
  text "GND" at 34.074,38.903 h0.64
  text "R0" at 36.931,38.903 h0.64
  text "R3" at 39.471,38.903 h0.64
  text "R2" at 42.011,38.903 h0.64
  text "AN" at 44.551,38.903 h0.64
  text "TX" at 47.091,38.903 h0.64
  text "H1T" at 49.367,38.903 h0.64
  text "H0E" at 51.854,38.903 h0.64
  text "RST" at 54.394,38.903 h0.64
  text "MISO" at 56.669,38.903 h0.64
  text "SCK" at 59.474,38.903 h0.64
  text "INT" at 122.967,38.903 h0.64
  text "RST" at 125.454,38.903 h0.64
  text "A" at 128.628,38.903 h0.64
  text "BTN" at 130.534,38.903 h0.64
  text "GND" at 133.074,38.903 h0.64
  text "R0" at 135.931,38.903 h0.64
  text "R3" at 138.471,38.903 h0.64
  text "R2" at 141.011,38.903 h0.64
  text "AN" at 143.551,38.903 h0.64
  text "TX" at 146.091,38.903 h0.64
  text "H1T" at 148.367,38.903 h0.64
  text "H0E" at 150.854,38.903 h0.64
  text "RST" at 153.394,38.903 h0.64
  text "MISO" at 155.669,38.903 h0.64
  text "SCK" at 158.474,38.903 h0.64
  text "CRD / nCE" at 61.569,37.71 h0.51
  text "LCD / RST" at 64.427,37.71 h0.51
  text "SCK" at 66.967,37.71 h0.51
  text "TCH / IRQ" at 72.047,37.71 h0.51
  text "CRD / nCE" at 160.569,37.71 h0.51
  text "LCD / RST" at 163.427,37.71 h0.51
  text "SCK" at 165.967,37.71 h0.51
  text "TCH / IRQ" at 171.047,37.71 h0.51
  text "ADC" at 23.787,36.617 h0.64
  text "ENCODER" at 28.867,36.617 h0.64
  text "KEYPAD" at 36.487,36.617 h0.64
  text "SONAR" at 44.107,36.617 h0.64
  text "SONIC" at 49.187,36.617 h0.64
  text "RFID" at 55.537,36.617 h0.64
  text "DISPLAY" at 65.697,36.617 h0.64
  text "ADC" at 122.787,36.617 h0.64
  text "ENCODER" at 127.867,36.617 h0.64
  text "KEYPAD" at 135.487,36.617 h0.64
  text "SONAR" at 143.107,36.617 h0.64
  text "SONIC" at 148.187,36.617 h0.64
  text "RFID" at 154.537,36.617 h0.64
  text "DISPLAY" at 164.697,36.617 h0.64
  text "STEPMTR" at 122.914,33.383 h0.64
  text "GYRO" at 128.946,33.383 h0.64
  text "NAV" at 134.344,33.383 h0.64
  text "PWR" at 148.314,33.383 h0.64
  text "SPI1" at 153.235,33.383 h0.64
  text "SPI4" at 159.479,33.383 h0.64
  text "UART5" at 165.459,33.383 h0.64
  text "GPIO" at 169.639,33.383 h0.64
  text "STEPMOTOR" at 5.26,33.1 h0.64
  text "ADS1115" at 15.76,33.1 h0.64
  text "STEPMOTOR" at 104.26,33.1 h0.64
  text "ADS1115" at 114.76,33.1 h0.64
  text "StandOS" at 76.5,32.75 h1
  text "StandOS" at 175.5,32.75 h1
  text "v.2 2022" at 89.15,32.65 h0.9
  text "v.2 2022" at 188.15,32.65 h0.9
  text "MOSI" at 133.074,31.605 h0.51
  text "MISO" at 160.971,31.605 h0.51
  text "MOSI" at 155.849,31.554 h0.56
  text "SCLK" at 135.389,31.529 h0.58
  text "IN4" at 122.967,31.478 h0.64
  text "IN2" at 125.507,31.478 h0.64
  text "INT" at 128.047,31.478 h0.64
  text "CS" at 130.851,31.478 h0.64
  text "INT" at 138.207,31.478 h0.64
  text "5V" at 148.631,31.478 h0.64
  text "GND" at 163.554,31.478 h0.64
  text "TX" at 166.411,31.478 h0.64
  text "nCE / 1" at 150.727,30.285 h0.64
  text "nCE / 0" at 153.267,30.285 h0.64
  text "nCE / 0" at 158.347,30.285 h0.64
  text "27" at 168.242,30.285 h0.58
  text "11" at 170.782,30.285 h0.51
  text "CS / M" at 140.62,30.168 h0.64
  text "MOTOR" at 23.702,29.345 h1
  text "GYRO" at 29.282,29.345 h1
  text "NAV" at 37.402,29.345 h1
  text "PWR" at 45.657,29.345 h1
  text "I2C" at 49.55,29.345 h1
  text "SPI1" at 53.662,29.345 h1
  text "SPI4" at 61.116,29.345 h1
  text "Commutation board / for Raspberry Pi" at 76.25,29.225 h0.8
  text "Commutation board / for Raspberry Pi" at 175.25,29.225 h0.8
  text "GPIO" at 68.736,29.218 h1
  text "MISO" at 155.891,29.065 h0.51
  text "MOSI" at 163.554,29.065 h0.51
  text "MISO" at 135.438,28.989 h0.58
  text "IN3" at 122.967,28.938 h0.64
  text "IN1" at 125.612,28.938 h0.64
  text "DR" at 128.311,28.938 h0.64
  text "SDO" at 130.534,28.938 h0.64
  text "3V3" at 148.314,28.938 h0.64
  text "SCK" at 153.394,28.938 h0.64
  text "SCK" at 161.014,28.938 h0.64
  text "RX" at 166.411,28.938 h0.64
  text "CS / A/G" at 132.64,27.745 h0.58
  text "nCE / 2" at 150.727,27.745 h0.64
  text "nCE / 1" at 158.347,27.745 h0.64
  text "26" at 168.242,27.745 h0.58
  text "8" at 170.782,27.745 h0.58
  text "DRDY / M" at 137.392,27.628 h0.58
  text "CS / ALT" at 140.567,27.628 h0.64
  text "GYRO GY-50" at 1.51,25.6 h0.64
  text "KEYPAD COM-08653" at 9.76,25.6 h0.64
  text "GYRO GY-50" at 100.51,25.6 h0.64
  text "KEYPAD COM-08653" at 108.76,25.6 h0.64
  text "#" at 76.26,25.4 h2.4
  text "#" at 175.26,25.4 h2.4
  text "AUDIO" at 90.118,22.711 h0.64
  text "AUDIO" at 189.118,22.711 h0.64
  text "DISPLAY MSP3520" at 78.01,22.6 h0.64
  text "DISPLAY MSP3520" at 177.01,22.6 h0.64
  text "PMOD NAV" at 1.76,19.1 h0.64
  text "PMOD NAV" at 100.76,19.1 h0.64
  text "H0 & H1" at 90.368,16.6 h0.64
  text "H0 & H1" at 189.368,16.6 h0.64
  text "Variant 1" at 28.901,15.281 h5
  text "Variant 6" at 126.933,14.852 h5
  text "RFID RC522" at 76.885,12.711 h0.64
  text "RFID RC522" at 175.885,12.711 h0.64
  text "PMOD COLOR" at 1.51,12.645 h0.64
  text "PMOD COLOR" at 100.51,12.645 h0.64
  text "LEDS" at 8.618,12.6 h0.64
  text "BUTTONS" at 15.618,12.6 h0.64
  text "H1" at 90.118,12.6 h0.64
  text "LEDS" at 107.618,12.6 h0.64
  text "BUTTONS" at 114.618,12.6 h0.64
  text "H1" at 189.118,12.6 h0.64
  text "H0" at 89.834,6.211 h0.64
  text "H0" at 188.834,6.211 h0.64
  text "PMODENC" at 1.76,6.1 h0.64
  text "KY-038" at 8.618,6.1 h0.64
  text "GL5516" at 15.76,6.1 h0.64
  text "GP2Y0A02YK0F" at 77.57,6.1 h0.64
  text "PMODENC" at 100.76,6.1 h0.64
  text "KY-038" at 107.618,6.1 h0.64
  text "GL5516" at 114.76,6.1 h0.64
  text "GP2Y0A02YK0F" at 176.57,6.1 h0.64
  text "ALRT" at 122.829,5.57 h0.51
  text "MDS" at 125.454,5.443 h0.64
  text "B" at 128.628,5.443 h0.64
  text "SWT" at 130.534,5.443 h0.64
  text "C1" at 133.497,5.443 h0.64
  text "C0" at 135.931,5.443 h0.64
  text "C2" at 138.471,5.443 h0.64
  text "R1" at 141.117,5.443 h0.64
  text "RX" at 143.551,5.443 h0.64
  text "PWM" at 145.774,5.443 h0.64
  text "H1E" at 148.367,5.443 h0.64
  text "H0T" at 150.854,5.443 h0.64
  text "IRQ" at 153.447,5.443 h0.64
  text "MOSI" at 155.722,5.443 h0.64
  text "SS" at 158.791,5.443 h0.64
  text "GND" at 171.174,5.443 h0.64
  text "PWR" at 23.036,4.572 h1
  text "ADC" at 28.872,4.572 h1
  text "ENCODER" at 33.329,4.572 h0.8
  text "KEYPAD" at 40.216,4.572 h1
  text "SONIC" at 48.536,4.572 h1
  text "RFID" at 55.486,4.572 h1
  text "DISPLAY" at 63.846,4.572 h1
  text "LCD / nCE" at 160.569,4.25 h0.51
  text "LCD / DC/RS" at 162.792,4.25 h0.51
  text "TCH / nCE" at 165.967,4.25 h0.51
  text "MISO" at 168.242,4.25 h0.64
  text "MOSI" at 168.634,3.03 h0.51
  text "INT" at 122.967,2.903 h0.64
  text "RST" at 125.454,2.903 h0.64
  text "A" at 128.628,2.903 h0.64
  text "BTN" at 130.534,2.903 h0.64
  text "GND" at 133.074,2.903 h0.64
  text "R0" at 135.931,2.903 h0.64
  text "R3" at 138.471,2.903 h0.64
  text "R2" at 141.011,2.903 h0.64
  text "AN" at 143.551,2.903 h0.64
  text "TX" at 146.091,2.903 h0.64
  text "H1T" at 148.367,2.903 h0.64
  text "H0E" at 150.854,2.903 h0.64
  text "RST" at 153.394,2.903 h0.64
  text "MISO" at 155.669,2.903 h0.64
  text "SCK" at 158.474,2.903 h0.64
  text "CRD / nCE" at 160.569,1.71 h0.51
  text "LCD / RST" at 163.427,1.71 h0.51
  text "SCK" at 165.967,1.71 h0.51
  text "TCH / IRQ" at 171.047,1.71 h0.51
  text "ADC" at 122.787,0.617 h0.64
  text "ENCODER" at 127.867,0.617 h0.64
  text "KEYPAD" at 135.487,0.617 h0.64
  text "SONAR" at 143.107,0.617 h0.64
  text "SONIC" at 148.187,0.617 h0.64
  text "RFID" at 154.537,0.617 h0.64
  text "DISPLAY" at 164.697,0.617 h0.64
Board:
  lines w0.1: 193,0 ccw(c193,4) 197,4 ; 193,0 ccw(c193,4) 197,4 ; 193,0 103,0 cw(c103,4) 99,4 99,9.5 ccw(c98.5,9.5) 98,9.5 98,4 cw(c94,4) 94,0 4,0 cw(c4,4) 0,4 0,31 cw(c4,31) 4,35 23.5,35 ccw(c23.5,35.5) 23.5,36 4,36 cw(c4,40) 0,40 0,67 cw(c4,67) 4,71 23.5,71 ccw(c23.5,71.5) 23.5,72 4,72 cw(c4,76) 0,76 0,103 cw(c4,103) 4,107 23.5,107 ccw(c23.5,107.5) 23.5,108 4,108 cw(c4,112) 0,112 0,139 cw(c4,139) 4,143 23.5,143 ccw(c23.5,143.5) 23.5,144 4,144 cw(c4,148) 0,148 0,175 cw(c4,175) 4,179 94,179 cw(c94,175) 98,175 98,169.5 ccw(c98.5,169.5) 99,169.5 99,175 cw(c103,175) 103,179 193,179 cw(c193,175) 197,175 197,148 cw(c193,148) 193,144 173.5,144 ccw(c173.5,143.5) 173.5,143 193,143 cw(c193,139) 197,139 197,112 cw(c193,112) 193,108 173.5,108 ccw(c173.5,107.5) 173.5,107 193,107 cw(c193,103) 197,103 197,76 cw(c193,76) 193,72 173.5,72 ccw(c173.5,71.5) 173.5,71 193,71 cw(c193,67) 197,67 197,40 cw(c193,40) 193,36 173.5,36 ccw(c173.5,35.5) 173.5,35 193,35 cw(c193,31) 197,31 197,4